# Altium PCB Copy of PWR_PCB.PcbDoc
Units mil, origin at the board's own origin, x right, y up, seen from the top; angles counter-clockwise.
Board outline 6000 x 4000 mil, 4 copper layers (Top Layer, GND Layer, Power Layer, Bottom Layer), stack 22.156 mil thick; 117 components, 88 nets, 434 pads, 478 vias.
Unrouted connection lines stored in the file: 169.
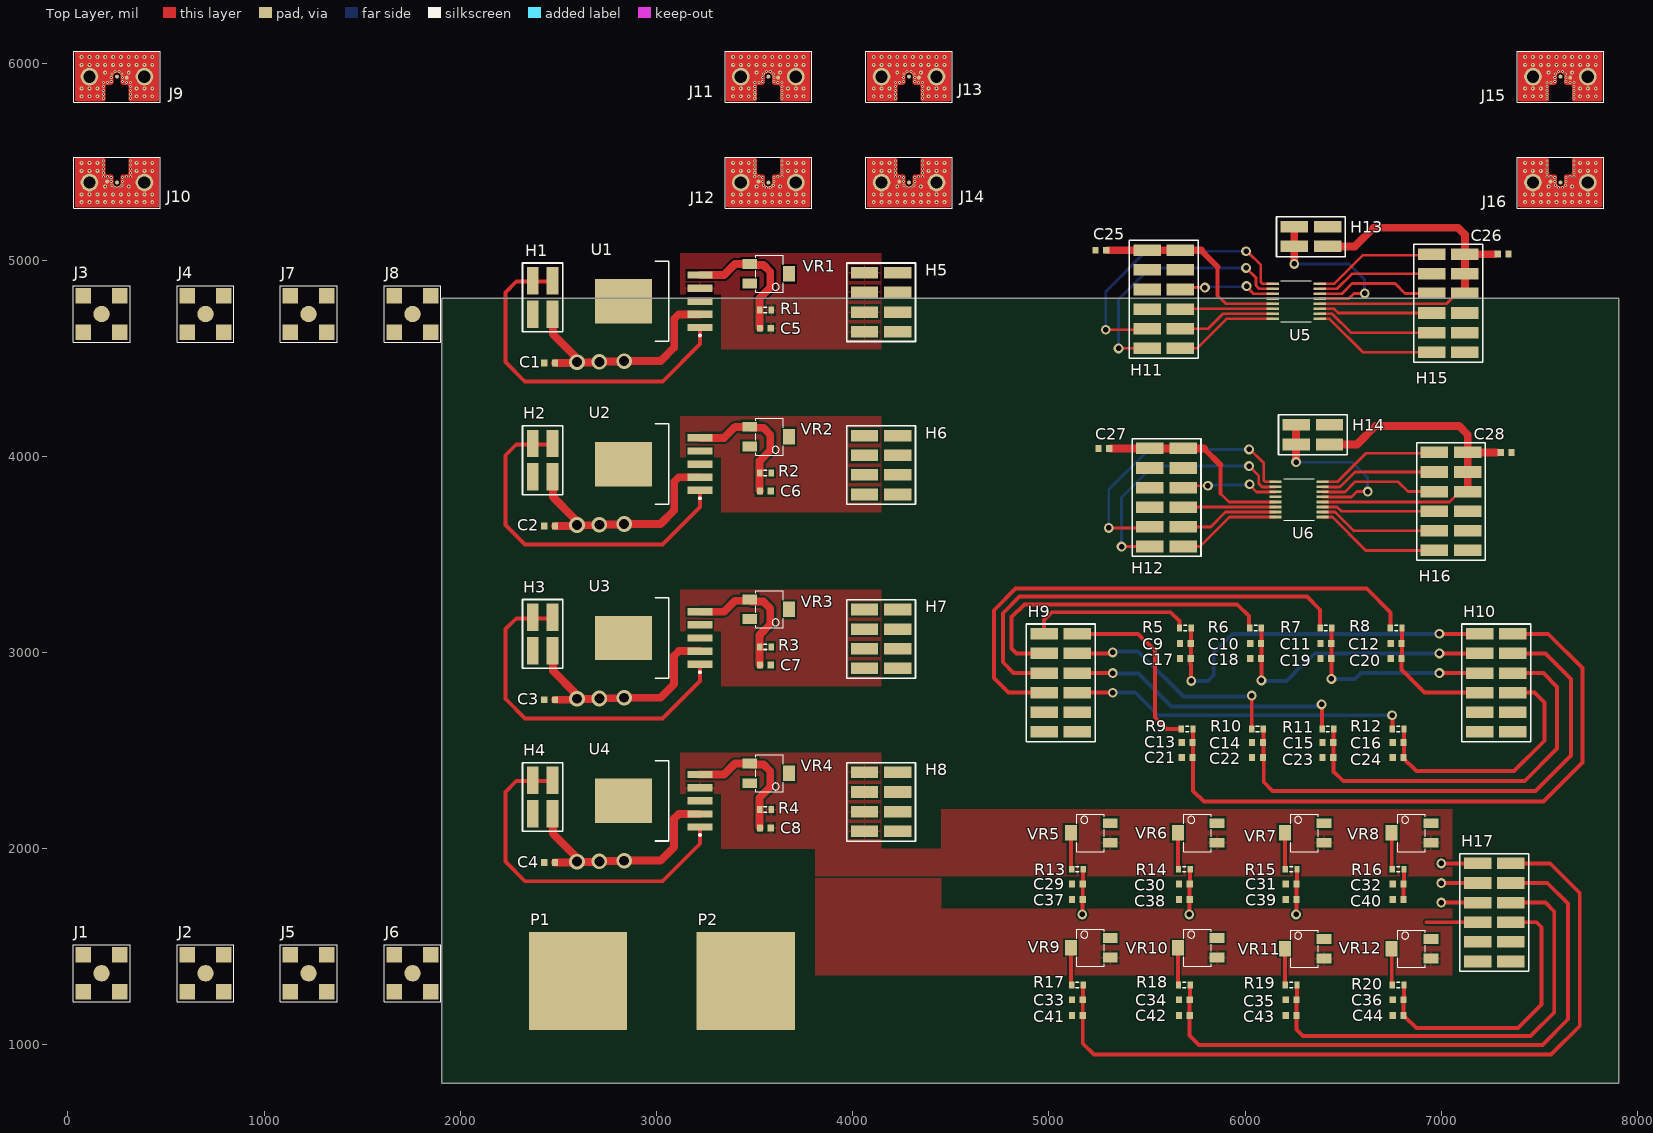
[diagram p0: Top Layer view]
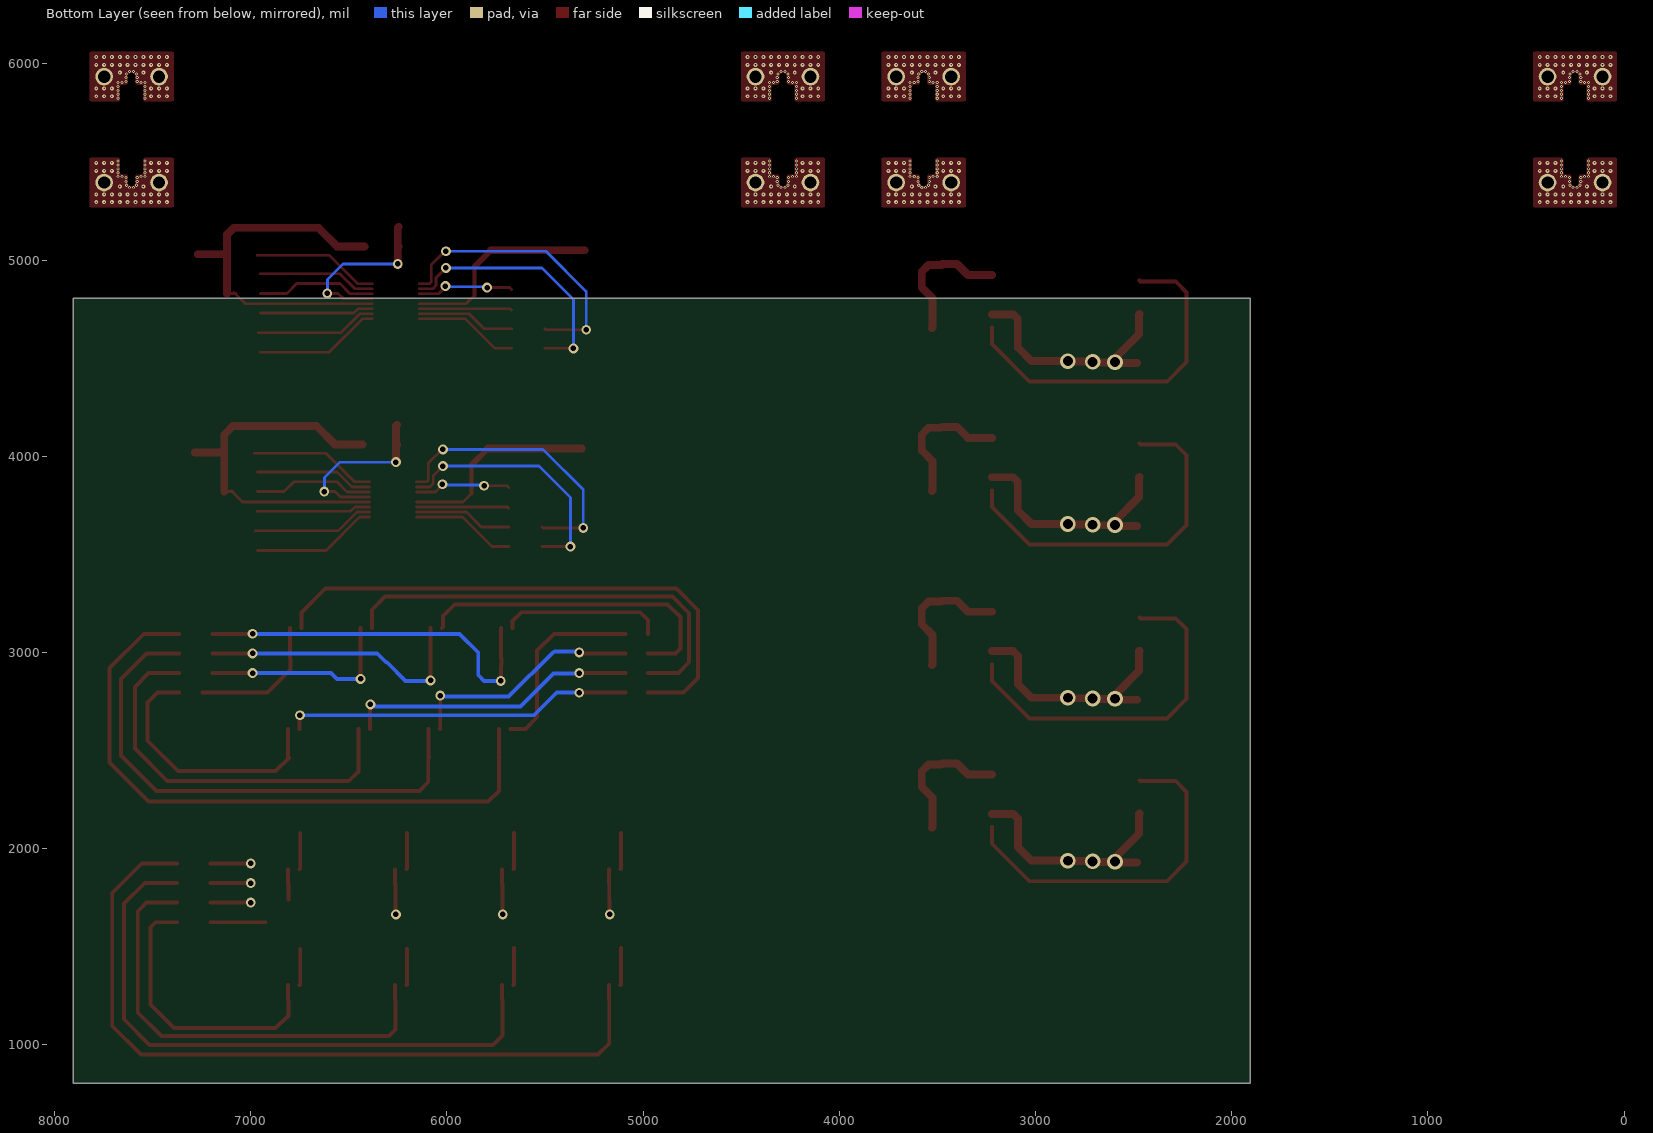
[diagram p1: Bottom Layer view, seen from below]
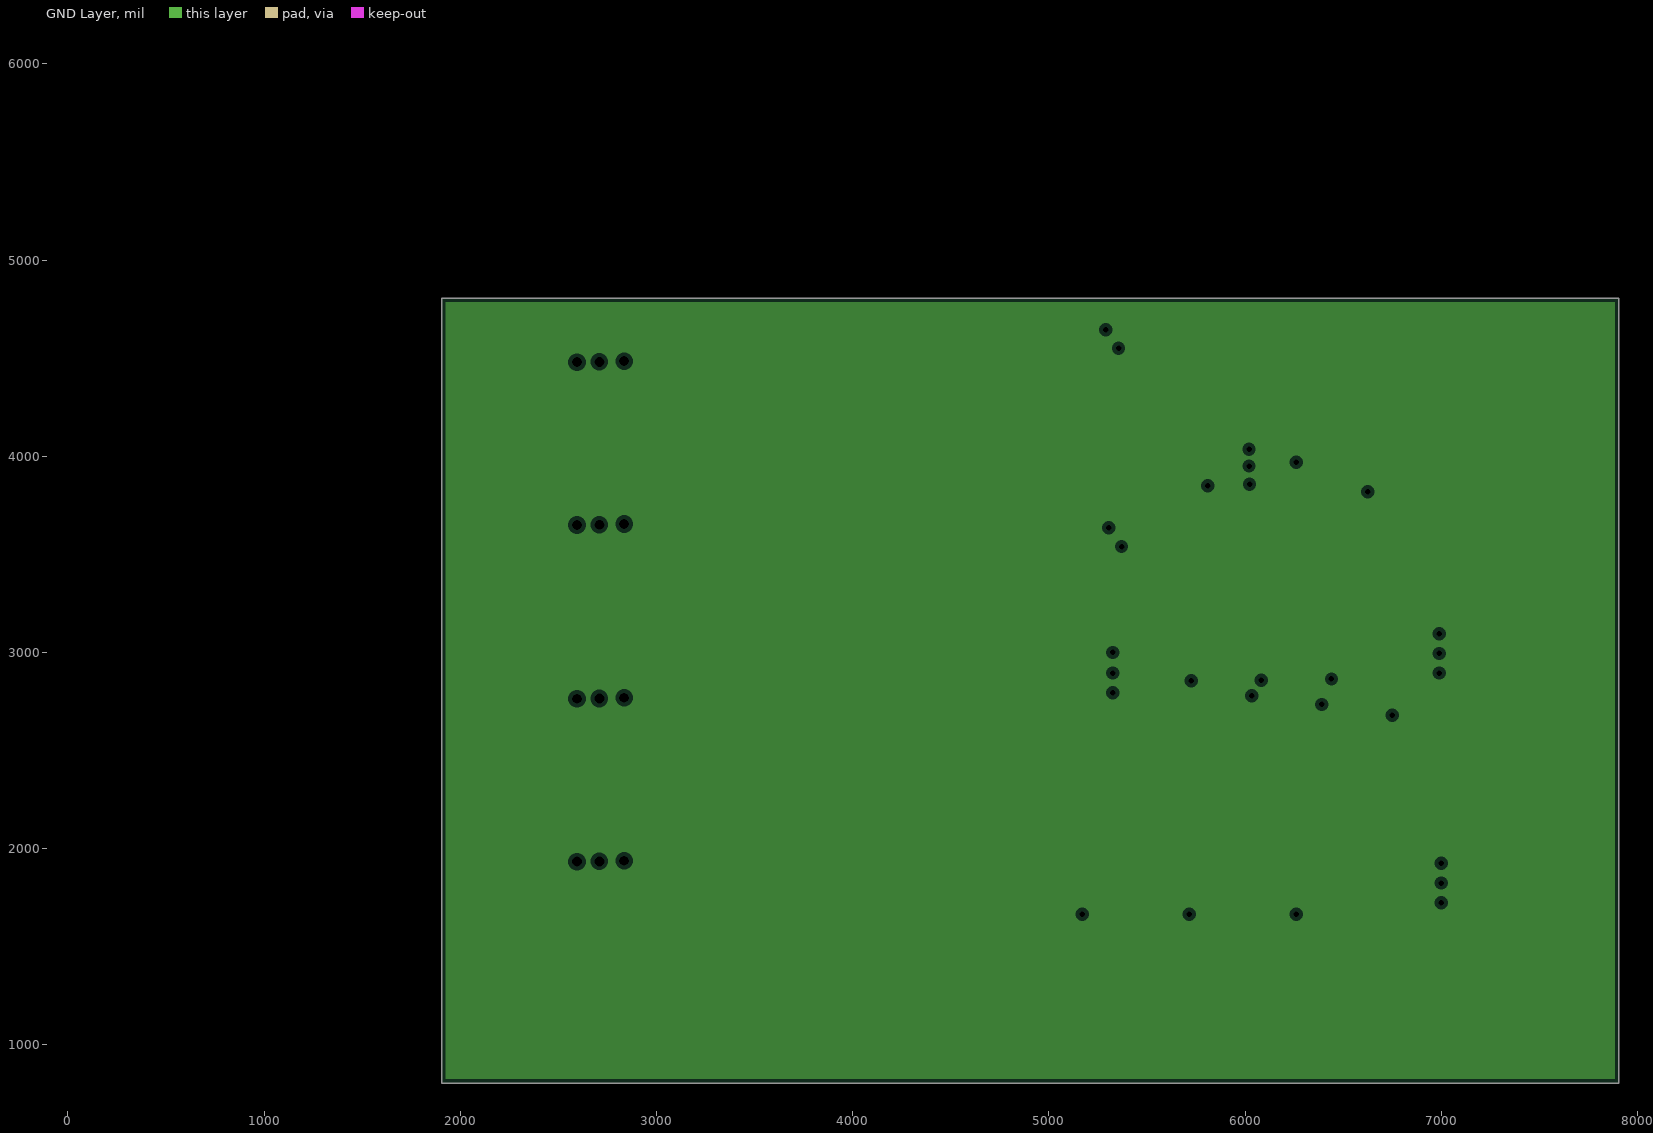
[diagram p2: GND Layer, clearances drawn from the general rule]
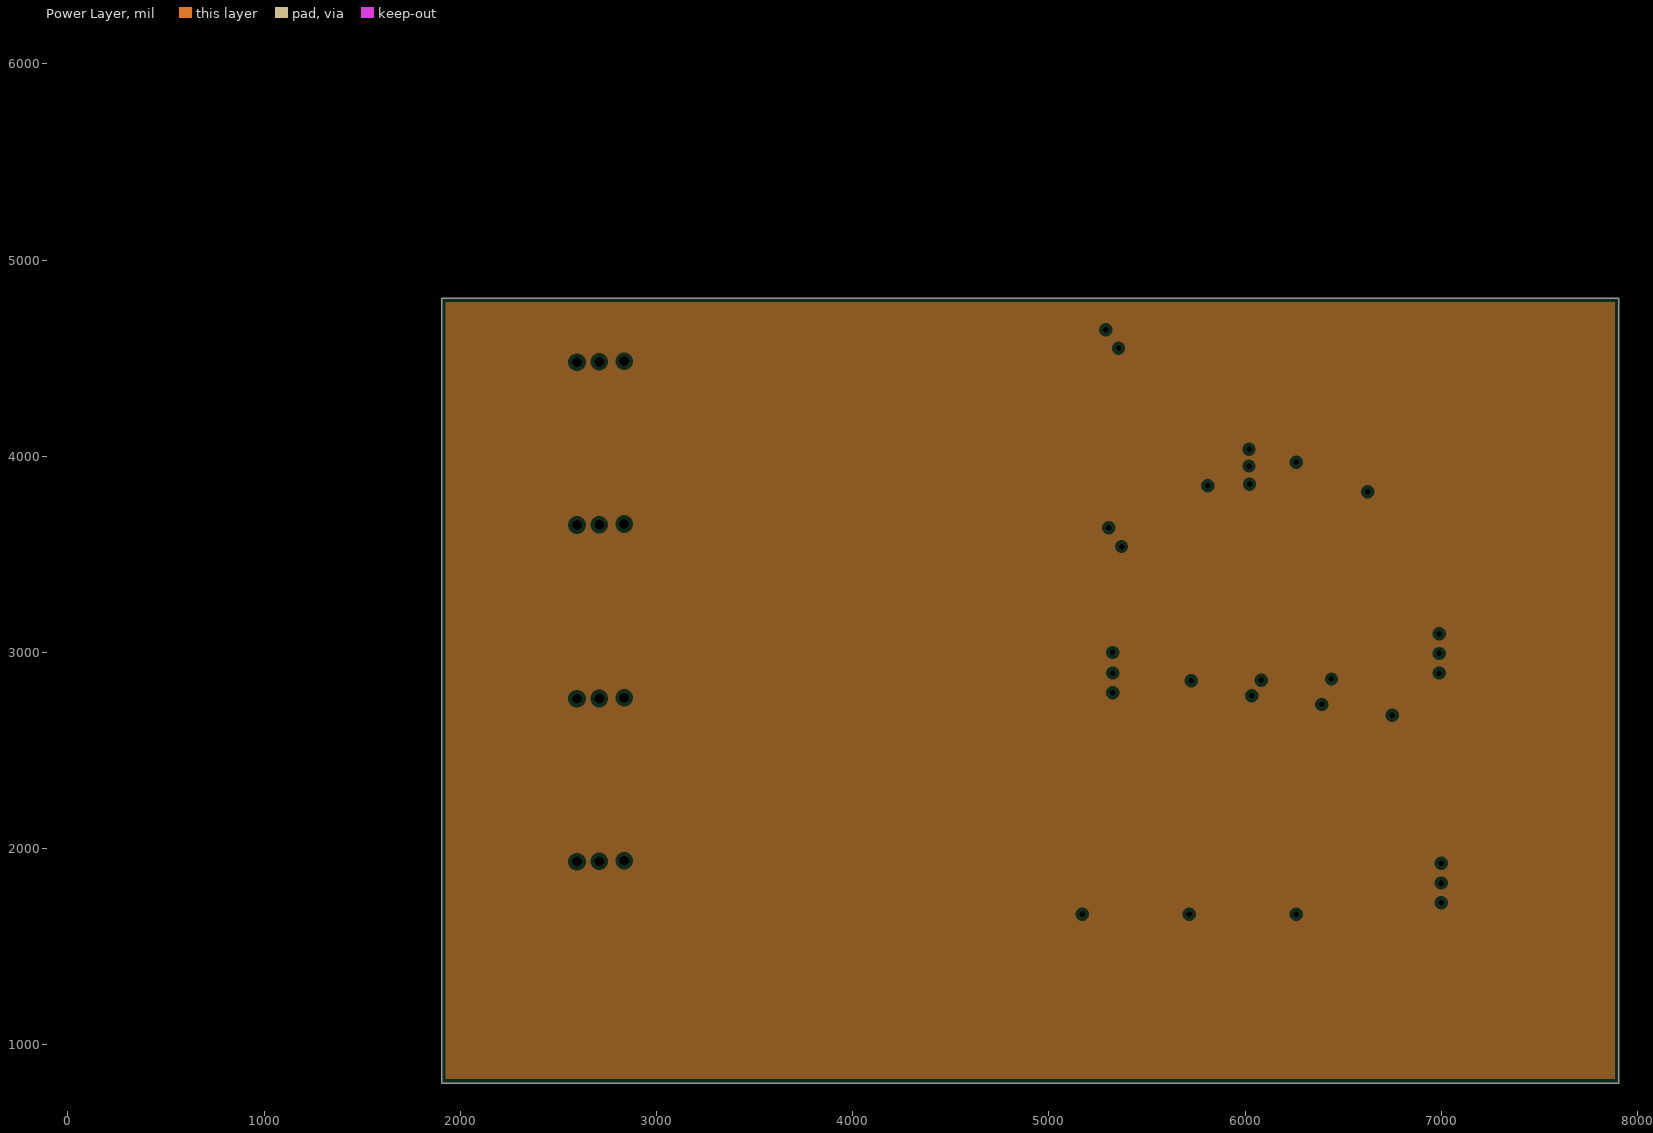
[diagram p3: Power Layer, clearances drawn from the general rule]

## Layer stack, top to bottom
Top Solder: solder mask 0.4, Solder Resist, Dk 3.5
Top Layer: signal copper 1.4
Dielectric 2: prepreg 2, PP-001, Dk 3.9
GND Layer: plane copper 1.378
Dielectric 1: dielectric 12.6, FR-4, Dk 4.8
Power Layer: plane copper 1.378
Dielectric 3: prepreg 2, PP-001, Dk 3.9
Bottom Layer: signal copper 1.4
Bottom Solder: solder mask 0.4, Solder Resist, Dk 3.5

## Board outline
1905,805 7905,805 7905,4805 1905,4805

## Design rules (kind name [scope] priority, off if disabled: settings)
Clearance [All] p1: gap=10 ignorepadtopadclearanceinfootprint=FALSE except(0: Arc-Hole Track-Hole SMDPad-Hole THPad-Hole Via-Hole Fill-Hole Poly-Hole Region-Hole Text-Hole)
DiffPairsRouting [All] p1: maxlimit=10 minlimit=10 mostfreqgap=10 toplayer_minwidth=15 toplayer_maxwidth=15 toplayer_prefwidth=15 bottomlayer_minwidth=15 bottomlayer_maxwidth=15 bottomlayer_prefwidth=15 maxuncoupledlength=500
PlaneClearance [All] p1: clearance=20
PlaneConnect [All] p1: planeconnectstyle=Relief reliefexpansion=20 reliefentries=4 reliefconductorwidth=10 reliefairgap=10
PolygonConnect [All] p1: connectstyle=Relief reliefconductorwidth=10 reliefentries=4 polygonreliefangle="90 Angle" airgapwidth=10
RoutingVias [All] p1: holewidth=28 width=50 viastyle="Through Hole" minholewidth=28 minwidth=50 maxholewidth=28 maxwidth=50
SolderMaskExpansion [All] p1: expansion=4 istentingtop=FALSE
Width [All] p1: maxlimit=40 minlimit=10 preferedwidth=20
27 further rules are at their usual default settings.

## Classes and differential pairs
component class PWR_PCB: C1 C2 C3 C4 C5 C6 C7 C8 C9 C10 C11 C12 C13 C14 C15 C16 C17 C18 C19 C20 C21 C22 C23 C24 C29 C30 C31 C32 C33 C34 C35 C36 C37 C38 C39 C40 H1 H2 H3 H4 H5 H6 H7 H8 H9 H10 H11 H12 H13 H14 J1 J2 J3 J4 J5 J6 J7 J8 J9 J10 J11 J12 J13 J14 J15 J16 P1 P2 R1 R2 R3 R4 R5 R6 R7 R8 R9 R10 R11 R12 R13 R14 R15 R16 R17 R18 R19 R20 U1 U2 U3 U4 U5 U6 VR1 VR2 VR3 VR4 VR5 VR6 VR7 VR8 VR9 VR10 VR11 VR12
differential pair CK3: +CK3_P -CK3_N
differential pair CK2: +CK2_P -CK2_N
differential pair CK1: +CK1_P -CK1_N
differential pair CK0: +CK0_P -CK0_N

## Components (designator, comment, footprint, x,y, rotation, side; value= is the part's Value field where it differs from the comment)
C1 "Cap Semi" 1608[0603] 2455,4475 r0 top value=10uF
C2 "Cap Semi" 1608[0603] 2455,3645 r0 top value=10uF
C3 "Cap Semi" 1608[0603] 2454.97,2758.92 r0 top value=10uF
C4 "Cap Semi" 1608[0603] 2454.97,1928.92 r0 top value=10uF
C5 "Cap Semi" 1608[0603] 3555,4652.5 r0 top value=3.3nF
C6 "Cap Semi" 1608[0603] 3555,3822.5 r0 top value=3.3nF
C7 "Cap Semi" 1608[0603] 3554.97,2936.42 r0 top value=3.3nF
C8 "Cap Semi" 1608[0603] 3554.97,2106.42 r0 top value=3.3nF
C9 "Cap Semi" 1608[0603] 5695,3045 r0 top value=10uF
C10 "Cap Semi" 1608[0603] 6053.33,3045 r0 top value=10uF
C11 "Cap Semi" 1608[0603] 6411.67,3045 r0 top value=10uF
C12 "Cap Semi" 1608[0603] 6770,3045 r0 top value=10uF
C13 "Cap Semi" 1608[0603] 5705,2540 r0 top value=10uF
C14 "Cap Semi" 1608[0603] 6063.33,2540 r0 top value=10uF
C15 "Cap Semi" 1608[0603] 6421.67,2540 r0 top value=10uF
C16 "Cap Semi" 1608[0603] 6780,2540 r0 top value=10uF
C17 "Cap Semi" 1608[0603] 5695,2970 r0 top value=1uF
C18 "Cap Semi" 1608[0603] 6053.33,2970 r0 top value=1uF
C19 "Cap Semi" 1608[0603] 6411.67,2970 r0 top value=1uF
C20 "Cap Semi" 1608[0603] 6770,2970 r0 top value=1uF
C21 "Cap Semi" 1608[0603] 5705,2465 r0 top value=1uF
C22 "Cap Semi" 1608[0603] 6063.33,2465 r0 top value=1uF
C23 "Cap Semi" 1608[0603] 6421.67,2465 r0 top value=1uF
C24 "Cap Semi" 1608[0603] 6780,2465 r0 top value=1uF
C25 "Cap Semi" 1608[0603] 5265,5050 r0 top value=1uF
C26 "Cap Semi" 1608[0603] 7315,5030 r180 top value=100nF
C27 "Cap Semi" 1608[0603] 5280,4040 r0 top value=1uF
C28 "Cap Semi" 1608[0603] 7330,4020 r180 top value=100nF
C29 "Cap Semi" 1608[0603] 5145,1820 r0 top value=10uF
C30 "Cap Semi" 1608[0603] 5690,1820 r0 top value=10uF
C31 "Cap Semi" 1608[0603] 6235,1820 r0 top value=10uF
C32 "Cap Semi" 1608[0603] 6780,1820 r0 top value=10uF
C33 "Cap Semi" 1608[0603] 5145,1230 r0 top value=10uF
C34 "Cap Semi" 1608[0603] 5690,1230 r0 top value=10uF
C35 "Cap Semi" 1608[0603] 6235,1230 r0 top value=10uF
C36 "Cap Semi" 1608[0603] 6780,1230 r0 top value=10uF
C37 "Cap Semi" 1608[0603] 5145,1740 r0 top value=1uF
C38 "Cap Semi" 1608[0603] 5690,1740 r0 top value=1uF
C39 "Cap Semi" 1608[0603] 6235,1740 r0 top value=1uF
C40 "Cap Semi" 1608[0603] 6780,1740 r0 top value=1uF
C41 "Cap Semi" 1608[0603] 5145,1150 r0 top value=1uF
C42 "Cap Semi" 1608[0603] 5690,1150 r0 top value=1uF
C43 "Cap Semi" 1608[0603] 6235,1150 r0 top value=1uF
C44 "Cap Semi" 1608[0603] 6780,1150 r0 top value=1uF
H1 "HEADER_2X2_SMT" HEADER_2X2_SMT 2420,4810 r90 top
H2 "HEADER_2X2_SMT" HEADER_2X2_SMT 2420,3980 r90 top
H3 "HEADER_2X2_SMT" HEADER_2X2_SMT 2419.97,3094.92 r90 top
H4 "HEADER_2X2_SMT" HEADER_2X2_SMT 2419.97,2263.92 r90 top
H5 "HEADER_2X4_SMT" HEADER_2X4_SMT 4145,4785 r180 top
H6 "HEADER_2X4_SMT" HEADER_2X4_SMT 4145,3955 r180 top
H7 "HEADER_2X4_SMT" HEADER_2X4_SMT 4144.97,3068.92 r180 top
H8 "HEADER_2X4_SMT" HEADER_2X4_SMT 4144.97,2238.92 r180 top
H9 "HEADER_2X6_SMT" HDR2X6_SMT 5060,2845 r0 top
H10 "HEADER_2X6_SMT" HDR2X6_SMT 7280,2845 r0 top
H11 "HEADER_2X6_SMT" HDR2X6_SMT 5585,4800 r180 top
H12 "HEADER_2X6_SMT" HDR2X6_SMT 5600,3790 r180 top
H13 "HEADER_2X2_SMT" HEADER_2X2_SMT 6335,5120 r180 top
H14 "HEADER_2X2_SMT" HEADER_2X2_SMT 6345,4110 r180 top
H15 "HEADER_2X6_SMT" HDR2X6_SMT 7035,4780 r180 top
H16 "HEADER_2X6_SMT" HDR2X6_SMT 7050,3770 r180 top
H17 "HEADER_2X6_SMT" HDR2X6_SMT 7270,1675 r0 top
J1 "Con RF SMA" CON-001-250X250/SMA-SMT 171.5,1365 r90 top
J2 "Con RF SMA" CON-001-250X250/SMA-SMT 701.5,1365 r90 top
J3 "Con RF SMA" CON-001-250X250/SMA-SMT 171.5,4725 r90 top
J4 "Con RF SMA" CON-001-250X250/SMA-SMT 701.5,4725 r90 top
J5 "Con RF SMA" CON-001-250X250/SMA-SMT 1226.5,1365 r90 top
J6 "Con RF SMA" CON-001-250X250/SMA-SMT 1756.5,1365 r90 top
J7 "Con RF SMA" CON-001-250X250/SMA-SMT 1226.5,4725 r90 top
J8 "Con RF SMA" CON-001-250X250/SMA-SMT 1756.5,4725 r90 top
J9 "CON_K_SMT_2d92" CON_K_SMT_2d92 250,5935 r270 top
J10 "CON_K_SMT_2d92" CON_K_SMT_2d92 250,5395 r90 top
J11 "CON_K_SMT_2d92" CON_K_SMT_2d92 3570,5935 r270 top
J12 "CON_K_SMT_2d92" CON_K_SMT_2d92 3570,5395 r90 top
J13 "CON_K_SMT_2d92" CON_K_SMT_2d92 4287,5935 r270 top
J14 "CON_K_SMT_2d92" CON_K_SMT_2d92 4287,5395 r90 top
J15 "CON_K_SMT_2d92" CON_K_SMT_2d92 7607,5935 r270 top
J16 "CON_K_SMT_2d92" CON_K_SMT_2d92 7607,5395 r90 top
P1 "BANANA_JACK_SMT" BANANA_JACK_SMT 2600,1325 r0 top
P2 "BANANA_JACK_SMT" BANANA_JACK_SMT 3455,1325 r0 top
R1 "Res3" J1-0603 3555,4745 r0 top value=1.4K
R2 "Res3" J1-0603 3555,3915 r0 top value=1.4K
R3 "Res3" J1-0603 3554.97,3028.92 r0 top value=1.4K
R4 "Res3" J1-0603 3554.97,2198.92 r0 top value=1.4K
R5 "Res3" J1-0603 5695,3125 r180 top value=1K
R6 "Res3" J1-0603 6053.33,3125 r180 top value=1K
R7 "Res3" J1-0603 6411.67,3125 r180 top value=1K
R8 "Res3" J1-0603 6770,3125 r180 top value=1K
R9 "Res3" J1-0603 5705,2610 r180 top value=1K
R10 "Res3" J1-0603 6063.33,2610 r180 top value=1K
R11 "Res3" J1-0603 6421.67,2610 r180 top value=1K
R12 "Res3" J1-0603 6780,2610 r180 top value=1K
R13 "Res3" J1-0603 5145,1895 r180 top value=1K
R14 "Res3" J1-0603 5690,1895 r180 top value=1K
R15 "Res3" J1-0603 6235,1895 r180 top value=1K
R16 "Res3" J1-0603 6780,1895 r180 top value=1K
R17 "Res3" J1-0603 5145,1305 r180 top value=1K
R18 "Res3" J1-0603 5690,1305 r180 top value=1K
R19 "Res3" J1-0603 6235,1305 r180 top value=1K
R20 "Res3" J1-0603 6780,1305 r180 top value=1K
U1 "LP38511TJ-ADJ" TJ5A_N 2985,4790 r180 top
U2 "LP38511TJ-ADJ" TJ5A_N 2985,3960 r180 top
U3 "LP38511TJ-ADJ" TJ5A_N 2984.97,3073.92 r180 top
U4 "LP38511TJ-ADJ" TJ5A_N 2984.97,2243.92 r180 top
U5 "MAX13003" MAX13003 6260,4790 r180 top
U6 "MAX13003" MAX13003 6275,3780 r180 top
VR1 "5K" POT_3214_Top 3574.97,4930 r0 top
VR2 "5K" POT_3214_Top 3574.97,4100 r0 top
VR3 "5K" POT_3214_Top 3574.97,3220 r0 top
VR4 "5K" POT_3214_Top 3574.97,2383.92 r0 top
VR5 "5K" POT_3214_Top 5212.19,2080 r180 top
VR6 "5K" POT_3214_Top 5757.19,2080 r180 top
VR7 "5K" POT_3214_Top 6302.19,2080 r180 top
VR8 "5K" POT_3214_Top 6847.19,2080 r180 top
VR9 "5K" POT_3214_Top 5212.19,1495 r180 top
VR10 "5K" POT_3214_Top 5757.19,1495 r180 top
VR11 "5K" POT_3214_Top 6302.19,1490 r180 top
VR12 "5K" POT_3214_Top 6847.19,1490 r180 top

## Footprints (in the part's own frame and the unit in brackets; to place one, negate y for a bottom-side part, rotate by r counter-clockwise, add the part's x,y. Pads: shape width x height; smd on the part's side, far side on the other; paste and mask are expansions set on the pad)
1608[0603] [mm] "Chip Capacitor, Body 1.6x0.8mm, IPC High Density"
  rect 0.8x0.9 smd: 1(-0.7,0) 2(0.7,0)
  body extent -0.87,-0.48 0.87,0.48, height 1.3
BANANA_JACK_SMT [mil]
  rect 500x500 smd: 1(0,0)
CON-001-250X250/SMA-SMT [mm]
  round 2.127 smd: 1(0,0)
  rect 2x2 smd: 2(-2.375,2.375) 3(2.375,2.375) 4(2.375,-2.375) 5(-2.375,-2.35)
  silkscreen extent -3.68,-3.68 3.68,3.68, body extent -3.17,-3.17 3.18,3.17, height 9.65
CON_K_SMT_2d92 [mil]
  round 90 hole 63: 1(0,140) 4(0,-140)
  round 19.68 smd paste-9.84 mask+9.84: 2(5,50)
  round 20 smd paste-10: 3(0,0)
  Top Layer region: -125.52,195 125.51,195 125.51,215 -125.52,215
  Top Layer region: -125.52,-215 125.51,-215 125.51,-195 -125.52,-195
  Top Layer region: -125,-205.52 -125.2,-205.48 -125.36,-205.36 -125.48,-205.2 -125.52,-205 -125.52,-205 -125.52,205 -125.46,205.22 -125.32,205.4 -125.11,205.5 -124.89,205.5 -124.68,205.4 -124.54,205.22 -124.48,205 -124.48,205 -124.48,0.51 -20.51,0.51 -17.59,10.55 -10.11,17.85 0,20.51 0,20.51 0.2,20.48 0.36,20.36 0.48,20.2 0.52,20 0.52,20 0.48,19.8 0.36,19.64 0.2,19.52 0,19.49 0,19.49 -7.46,18 -13.78,13.78 -18,7.46 -19.48,0 -19.48,0 -18,-7.46 -13.78,-13.78 -7.46,-18 0,-19.49 0,-19.49 30,-19.49 34.02,-20.29 37.44,-22.56 39.71,-25.98 40.52,-30 40.52,-30 40.49,-30.15 40.43,-30.29 40.43,-30.29 40.49,-30.42 40.52,-30.58 40.52,-30.58 40.52,-50 41.24,-53.63 43.29,-56.71 46.37,-58.76 50,-59.49 50,-59.49 115,-59.48 119.02,-60.29 122.44,-62.56 124.71,-65.98 125.52,-70 125.52,-70 125.52,-205 125.48,-205.2 125.36,-205.36 125.2,-205.48 125,-205.51 125,-205.51
  Top Layer region: -125.52,-205 -125.46,-205.22 -125.32,-205.4 -125.11,-205.5 -124.89,-205.5 -124.68,-205.4 -124.54,-205.22 -124.48,-205 -124.48,-205 -124.48,-0.52 -20.51,-0.51 -17.59,-10.55 -10.11,-17.85 0,-20.51 0,-20.51 0.2,-20.48 0.36,-20.36 0.48,-20.2 0.52,-20 0.52,-20 0.48,-19.8 0.36,-19.64 0.2,-19.52 0,-19.49 0,-19.49 -7.46,-18 -13.78,-13.78 -18,-7.46 -19.48,0 -19.48,0 -18,7.46 -13.78,13.78 -7.46,18 0,19.49 0,19.49 30,19.49 34.02,20.29 37.44,22.56 39.71,25.98 40.52,30 40.52,30 40.52,50 41.24,53.63 43.29,56.71 46.37,58.76 50,59.49 50,59.49 115,59.49 119.02,60.29 122.44,62.56 124.71,65.98 125.52,70 125.52,70 125.52,205 125.48,205.2 125.36,205.36 125.2,205.48 125,205.52 125,205.52 -125,205.51 -125.2,205.48 -125.36,205.36 -125.48,205.2 -125.52,205 -125.52,205
  silkscreen extent -130,-220 130,220
HDR2X6_SMT [mil]
  rect 140x59.06 smd: 1(-85,250) 2(-85,150) 3(-85,50) 4(-85,-50) 5(-85,-150) 6(-85,-250) 7(85,250) 8(85,150) 9(85,50) 10(85,-50) 11(85,-150) 12(85,-250)
  silkscreen extent -175,-300 175,300
HEADER_2X2_SMT [mil]
  rect 140x59.06 smd: 1(-85,50) 2(85,50) 3(-85,-50) 4(85,-50)
  silkscreen extent -175,-101 175,103
HEADER_2X4_SMT [mil]
  rect 140x59.06 smd: 1(-85,150) 2(85,150) 3(-85,50) 4(85,50) 5(-85,-50) 6(85,-50) 7(-85,-150) 8(85,-150)
  silkscreen extent -175,-200 175,200
J1-0603 [mm] "Chip Resistor, Body 1.6x0.8mm, IPC High Density"
  rect 0.7x0.9 smd: 1(-0.75,0) 2(0.75,0)
  silkscreen extent -0.2,-0.35 0.2,0.35, body extent -0.85,-0.48 0.85,0.48, height 0.9
MAX13003 [mil]
  rect 62.5x13.5 smd paste+0 mask+2: 1(-119.75,89.57) 2(-119.75,63.98) 3(-119.75,38.39) 4(-119.75,12.8) 5(-119.75,-12.8) 6(-119.75,-38.39) 7(-119.75,-63.98) 8(-119.75,-89.57) 9(119.75,-89.57) 10(119.75,-63.98) 11(119.75,-38.39) 12(119.75,-12.8) 13(119.75,12.8) 14(119.75,38.39) 15(119.75,63.98) 16(119.75,89.57)
  silkscreen extent -78,-106 78,106
POT_3214_Top [mil] "5 turn Trimpot, 3214, Top adjust"
  rect 75x50 smd: 1(-100,50) 3(-100,-50)
  rect 61x79 smd: 2(100,0)
  silkscreen extent -70,-95 70,95, body extent -70,-95 70,95, height 200
TJ5A_N [mm] "D2-PAK, 6-Leads, Body 9.9x10.2mm, Pitch 1.7mm, Lead Span 14mm, IPC Medium Density"
  rect 3.2x0.95 smd: 1(-6,3.4) 2(-6,1.7) 3(-6,0) 4(-6,-1.7) 5(-6,-3.4)
  rect 7.4x5.75 smd: 6(3.9,0)
  silkscreen extent -6.13,-5.2 -0.2,5.2, body extent -1.95,-5.2 8.15,5.2, height 2.1

## Part data
C1 C2 C3 C4 C5 C6 C7 C8 C9 C10 C11 C12 C13 C14 C15 C16 C17 C18 C19 C20 C21 C22 C23 C24 C25 C26 C27 C28 C29 C30 C31 C32 C33 C34 C35 C36 C37 C38 C39 C40 C41 C42 C43 C44: "Capacitor (Semiconductor SIM Model)", LatestRevisionDate=29-May-2009, LatestRevisionNote="IPC-7351 Footprint Added.", PackageDescription="Chip Capacitor", PackageReference=C1206, Published=8-Jun-2000, Publisher="Altium Limited"
J1 J2 J3 J4 J5 J6 J7 J8: library part CON_RF_SMA
J9 J10 J11 J12 J13 J14 J15 J16: "Con RF K"
R1 R2 R3 R4 R5 R6 R7 R8 R9 R10 R11 R12 R13 R14 R15 R16 R17 R18 R19 R20: "Resistor", LatestRevisionDate=29-May-2009, LatestRevisionNote="IPC-7351 Footprint Added.", PackageDescription="Chip Resistor", PackageReference=J1-0603, Published=8-Jun-2000, Publisher="Altium Limited"
U1 U2 U3 U4: "800 mA Fast-Transient Response Low-Dropout Linear Voltage Regulator with Error Flag, 6-pin TO-263 Thin", Manufacturer="National Semiconductor", PackageTopMarking=NSUZXYTTE#*LP38511*TJ-ADJ, PowerWise=N, ComponentLink1Description="Manufacturer URL", ComponentLink1URL=http://www.national.com/, ComponentLink2Description="LP38511 Datasheet", ComponentLink2URL=http://www.national.com/ds/LP/LP38511-ADJ.pdf, ComponentLink3Description="LP38511 Web Page", ComponentLink3URL=http://www.national.com/pf/LP/LP38511.html, ComponentLink4Description="TJ5A Package Page", ComponentLink4URL=http://www.national.com/packaging/folders/tj5a.html, CompType="LDO IC", DatasheetVersion=Feb-2009, High-Reliability=Y, PackageDescription="Thin TO-263, Molded, 9.85 x 10.16 x 2mm Body, 5 Lead, 1.7mm Pitch, Surface Mount", PackageReference=TJ5A, PackageVersion="revE, Jan-2008", PartNumber=LP38511TJ-ADJ, PinCount=5, RoHS=Y
VR1 VR2 VR3 VR4 VR5 VR6 VR7 VR8 VR9 VR10 VR11 VR12: library part RPot_5K, "Potentiometer", Manufacturer=Bourns, Manufacturer ID=3214X-1-502E, Digikey ID=3214X-1-502ECT-ND

## Via types
v1: diameter 20, hole 8, Top Layer to Bottom Layer, tented both sides, 272 vias
v2: diameter 15.98, hole 6, Top Layer to Bottom Layer, tented both sides, 160 vias
v3: diameter 50, hole 28, Top Layer to Bottom Layer, 34 vias
v4: diameter 80, hole 50, Top Layer to Bottom Layer, 12 vias

## Nets (pads, with @x,y where several pads share a name; then routed paths per layer and width w, separated by ;. In a path a pad name is that pad's centre, name@x,y a point inside that pad or via, vN(x,y) a via of type N, cw(c..) or ccw(c..) an arc to the next point about the centre after c; other vN are vias at no path point)
CK0_N: J3.1 J7.1
CK0_P: J1.1 J5.1
CK1_N: J4.1 J8.1
CK1_P: J2.1 J6.1
CK2_N: J10.3 J14.3
CK2_P: J9.3 J13.3
CK3_N: J12.3 J16.3
CK3_P: J11.3 J15.3
DIG0_0: H15.7 U5.1 | length 640.8
  Top Layer w14: U5.1 6429.57,4700.43 6600,4530 H15.7
DIG0_1: H16.7 U6.1 | length 640.8
  Top Layer w14: U6.1 6444.57,3690.43 6615,3520 H16.7
DIG0_V33_0: H11.1 U5.16 | length 532.6
  Top Layer w14: H11.1 5755,4550 5905.43,4700.43 U5.16
DIG0_V33_1: H12.1 U6.16 | length 532.6
  Top Layer w14: H12.1 5770,3540 5920.43,3690.43 U6.16
DIG1_0: H15.8 U5.2 | length 620
  Top Layer w14: U5.2 6443.98,4726.02 6540,4630 H15.8 H15.8@6960,4630
DIG1_1: H16.8 U6.2 | length 620
  Top Layer w14: U6.2 6458.98,3716.02 6555,3620 H16.8 H16.8@6975,3620
DIG1_V33_0: H11.2 U5.15 | length 501.7
  Top Layer w14: H11.2 5810,4650 5886.02,4726.02 U5.15
DIG1_V33_1: H12.2 U6.15 | length 501.7
  Top Layer w14: H12.2 5825,3640 5901.02,3716.02 U6.15
DIG2_0: H15.9 U5.3 | length 579.2
  Top Layer w14: U5.3 6453.39,4751.61 6475,4730 H15.9
DIG2_1: H16.9 U6.3 | length 579.2
  Top Layer w14: U6.3 6468.39,3741.61 6490,3720 H16.9
DIG2_V33_0: H11.3 U5.14 | length 473
  Top Layer w14: H11.3@5670,4745 5676.61,4751.61 U5.14
DIG2_V33_1: H12.3 U6.14 | length 473
  Top Layer w14: H12.3@5685,3735 5691.61,3741.61 U6.14
DIG3_0: H15.10 U5.6 | length 612.3
  Top Layer w14: U5.6 6493.39,4828.39 6545,4880 6765,4880 6815,4830 H15.10
DIG3_1: H16.10 U6.6 | length 612.3
  Top Layer w14: U6.6 6508.39,3818.39 6560,3870 6780,3870 6830,3820 H16.10
DIG3_V33_0: H11.4 U5.11 | length 495.6
  Top Layer w14: H11.4 5680,4860 v3(5795,4860) ; v3(6007.5,4867.5) 6007.5,4864.23 6043.34,4828.39 U5.11
  Bottom Layer w14: v3(5795,4860) 5798.75,4863.75 6003.75,4863.75 v3(6007.5,4867.5)
DIG3_V33_1: H12.4 U6.11 | length 495.6
  Top Layer w14: H12.4 5695,3850 v3(5810,3850) ; v3(6022.5,3857.5) 6022.5,3854.23 6058.34,3818.39 U6.11
  Bottom Layer w14: v3(5810,3850) 5813.75,3853.75 6018.75,3853.75 v3(6022.5,3857.5)
DIG4_0: H15.11 U5.7 | length 601.7
  Top Layer w14: U5.7 6468.98,4853.98 6545,4930 H15.11
DIG4_1: H16.11 U6.7 | length 601.7
  Top Layer w14: U6.7 6483.98,3843.98 6560,3920 H16.11
DIG4_V33_0: H11.7 U5.10 | length 1313.9
  Top Layer w14: v3(5355,4550) H11.7 ; v3(6005,4960) 6055,4910 6055,4870 6071.02,4853.98 U5.10
  Bottom Layer w14: v3(5355,4550) 5355,4800 5515,4960 v3(6005,4960)
DIG4_V33_1: H12.7 U6.10 | length 1313.9
  Top Layer w14: v3(5370,3540) H12.7 ; v3(6020,3950) 6070,3900 6070,3860 6086.02,3843.98 U6.10
  Bottom Layer w14: v3(5370,3540) 5370,3790 5530,3950 v3(6020,3950)
DIG5_0: H15.12 U5.8 | length 645.5
  Top Layer w14: U5.8 6454.57,4879.57 6600,5025 6930,5025 6935,5025 H15.12@6965,5025
DIG5_1: H16.12 U6.8 | length 645.5
  Top Layer w14: U6.8 6469.57,3869.57 6615,4015 6945,4015 6950,4015 H16.12@6980,4015
DIG5_V33_0: H11.8 U5.9 | length 1461.9
  Top Layer w14: v3(5290,4645) 5495,4645 H11.8 ; v3(6005,5045) 6010,5045 6080,4975 6080,4887.77 6088.2,4879.57 U5.9
  Bottom Layer w14: v3(5290,4645) 5290,4840 5495,5045 v3(6005,5045)
DIG5_V33_1: H12.8 U6.9 | length 1461.9
  Top Layer w14: v3(5305,3635) 5510,3635 H12.8 ; v3(6020,4035) 6025,4035 6095,3965 6095,3877.77 6103.2,3869.57 U6.9
  Bottom Layer w14: v3(5305,3635) 5305,3830 5510,4035 v3(6020,4035)
EN_LVL_0: H13.2 H13.4 U5.5 | length 896.4
  Top Layer w14: U5.5 6527.8,4802.8 6555,4830 v3(6610,4830)
  Top Layer w40: H13.2@6245,5070 6250,5075 6250,5165 H13.4@6245,5170 ; H13.2@6247.5,5062.97 6250,5060.47 v3(6250,4980)
  Bottom Layer w14: v3@6245,4980 6530,4980 6608.97,4901.03 v3@6608.97,4831.03
EN_LVL_1: H14.2 H14.4 U6.5 | length 897.8
  Top Layer w14: U6.5 6542.8,3792.8 6570,3820 v3(6625,3820)
  Top Layer w40: H14.2@6255,4060 6260,4065 6260,4155 H14.4@6255,4160 ; H14.2@6257.5,4052.97 6260,4050.47 v3(6260,3970)
  Bottom Layer w14: v3(6260,3970) 6545,3970 6623.97,3891.03 6623.97,3821.03 v3(6625,3820)
EN_VDD0: H1.2 H1.4 U1.1 | length 1816.6
  Top Layer w20: H1.4 2465,4890 2370,4890 2285,4890 2230,4835 2230,4480 2330,4380 3030,4380 3221.22,4571.22 U1.1
EN_VDD1: H2.2 H2.4 U2.1 | length 1816.6
  Top Layer w20: H2.4 2465,4060 2370,4060 2285,4060 2230,4005 2230,3650 2330,3550 3030,3550 3221.22,3741.22 U2.1
EN_VDD2: H3.2 H3.4 U3.1 | length 1816.6
  Top Layer w20: H3.4@2469.97,3178.92 2464.97,3173.92 2369.97,3173.92 2284.97,3173.92 2229.97,3118.92 2229.97,2763.92 2329.97,2663.92 3029.97,2663.92 3221.19,2855.14 U3.1
EN_VDD3: H4.2 H4.4 U4.1 | length 1816.6
  Top Layer w20: H4.4 2464.97,2343.92 2369.97,2343.92 2284.97,2343.92 2229.97,2288.92 2229.97,1933.92 2329.97,1833.92 3029.97,1833.92 3221.19,2025.14 U4.1
GND: C1.1 C2.1 C3.1 C4.1 C9.1 C10.1 C11.1 C12.1 C13.1 C14.1 C15.1 C16.1 C17.1 C18.1 C19.1 C20.1 C21.1 C22.1 C23.1 C24.1 C25.1 C26.1 C27.1 C28.1 C29.1 C30.1 C31.1 C32.1 C33.1 C34.1 C35.1 C36.1 C37.1 C38.1 C39.1 C40.1 C41.1 C42.1 C43.1 C44.1 H1.1 H2.1 H3.1 H4.1 H5.1 H5.3 H5.5 H5.7 H6.1 H6.3 H6.5 H6.7 H7.1 H7.3 H7.5 H7.7 H8.1 H8.3 H8.5 H8.7 H9.5 H9.11 H10.5 H10.11 H11.5 H11.11 H12.5 H12.11 H13.3 H14.3 H15.1 H15.2 H15.3 H16.1 H16.2 H16.3 H17.5 H17.11 J1.2 J1.3 J1.4 J1.5 J2.2 J2.3 J2.4 J2.5 J3.2 J3.3 J3.4 J3.5 J4.2 J4.3 J4.4 J4.5 J5.2 J5.3 J5.4 J5.5 J6.2 J6.3 J6.4 J6.5 J7.2 J7.3 J7.4 J7.5 J8.2 J8.3 J8.4 J8.5 J9.1 J9.2 J9.4 J10.1 J10.2 J10.4 J11.1 J11.2 J11.4 J12.1 J12.2 J12.4 J13.1 J13.2 J13.4 J14.1 J14.2 J14.4 J15.1 J15.2 J15.4 J16.1 J16.2 J16.4 P2.1 U1.3 U1.6 U2.3 U2.6 U3.3 U3.6 U4.3 U4.6 U5.12 U6.12 VR1.2 VR2.2 VR3.2 VR4.2
  other v1: 70,5295 110,5295 150,5295 190,5295 230,5295 270,5295 310,5295 350,5295 390,5295 430,5295 3390,5295 3430,5295 3470,5295 3510,5295 3550,5295 3590,5295 3630,5295 3670,5295 3710,5295 3750,5295 4107,5295 4147,5295 4187,5295 4227,5295 4267,5295 4307,5295 4347,5295 4387,5295 4427,5295 4467,5295 7427,5295 7467,5295 7507,5295 7547,5295 7587,5295 7627,5295 7667,5295 7707,5295 7747,5295 7787,5295 70,5335 110,5335 150,5335 190,5335 230,5335 270,5335 310,5335 350,5335 390,5335 430,5335 3390,5335 3430,5335 3470,5335 3510,5335 3550,5335 3590,5335 3630,5335 3670,5335 3710,5335 3750,5335 4107,5335 4147,5335 4187,5335 4227,5335 4267,5335 4307,5335 4347,5335 4387,5335 4427,5335 4467,5335 7427,5335 7467,5335 7507,5335 7547,5335 7587,5335 7627,5335 7667,5335 7707,5335 7747,5335 7787,5335 190,5375 310,5375 3510,5375 3630,5375 4227,5375 4347,5375 7547,5375 7667,5375 70,5455 110,5455 150,5455 350,5455 390,5455 430,5455 3390,5455 3430,5455 3470,5455 3670,5455 3710,5455 3750,5455 4107,5455 4147,5455 4187,5455 4387,5455 4427,5455 4467,5455 7427,5455 7467,5455 7507,5455 7707,5455 7747,5455 7787,5455 70,5495 110,5495 150,5495 350,5495 390,5495 430,5495 3390,5495 3430,5495 3470,5495 3670,5495 3710,5495 3750,5495 4107,5495 4147,5495 4187,5495 4387,5495 4427,5495 4467,5495 7427,5495 7467,5495 7507,5495 7707,5495 7747,5495 7787,5495 70,5835 110,5835 150,5835 350,5835 390,5835 430,5835 3390,5835 3430,5835 3470,5835 3670,5835 3710,5835 3750,5835 4107,5835 4147,5835 4187,5835 4387,5835 4427,5835 4467,5835 7427,5835 7467,5835 7507,5835 7707,5835 7747,5835 7787,5835 70,5875 110,5875 150,5875 350,5875 390,5875 430,5875 3390,5875 3430,5875 3470,5875 3670,5875 3710,5875 3750,5875 4107,5875 4147,5875 4187,5875 4387,5875 4427,5875 4467,5875 7427,5875 7467,5875 7507,5875 7707,5875 7747,5875 7787,5875 190,5955 310,5955 3510,5955 3630,5955 4227,5955 4347,5955 7547,5955 7667,5955 70,5995 110,5995 150,5995 190,5995 230,5995 270,5995 310,5995 350,5995 390,5995 430,5995 3390,5995 3430,5995 3470,5995 3510,5995 3550,5995 3590,5995 3630,5995 3670,5995 3710,5995 3750,5995 4107,5995 4147,5995 4187,5995 4227,5995 4267,5995 4307,5995 4347,5995 4387,5995 4427,5995 4467,5995 7427,5995 7467,5995 7507,5995 7547,5995 7587,5995 7627,5995 7667,5995 7707,5995 7747,5995 7787,5995 70,6035 110,6035 150,6035 190,6035 230,6035 270,6035 310,6035 350,6035 390,6035 430,6035 3390,6035 3430,6035 3470,6035 3510,6035 3550,6035 3590,6035 3630,6035 3670,6035 3710,6035 3750,6035 4107,6035 4147,6035 4187,6035 4227,6035 4267,6035 4307,6035 4347,6035 4387,6035 4427,6035 4467,6035 7427,6035 7467,6035 7507,6035 7547,6035 7587,6035 7627,6035 7667,6035 7707,6035 7747,6035 7787,6035
  other v2: 240,5369 260,5369 3560,5369 3580,5369 4277,5369 4297,5369 7597,5369 7617,5369 225,5381 275,5381 3545,5381 3595,5381 4262,5381 4312,5381 7582,5381 7632,5381 221,5400 279,5400 3541,5400 3599,5400 4258,5400 4316,5400 7578,5400 7636,5400 221,5420 279,5420 3541,5420 3599,5420 4258,5420 4316,5420 7578,5420 7636,5420 181,5425 202,5425 298,5425 319,5425 3501,5425 3522,5425 3618,5425 3639,5425 4218,5425 4239,5425 4335,5425 4356,5425 7538,5425 7559,5425 7655,5425 7676,5425 181,5445 319,5445 3501,5445 3639,5445 4218,5445 4356,5445 7538,5445 7676,5445 181,5465 319,5465 3501,5465 3639,5465 4218,5465 4356,5465 7538,5465 7676,5465 181,5485 319,5485 3501,5485 3639,5485 4218,5485 4356,5485 7538,5485 7676,5485 181,5505 319,5505 3501,5505 3639,5505 4218,5505 4356,5505 7538,5505 7676,5505 181,5825 319,5825 3501,5825 3639,5825 4218,5825 4356,5825 7538,5825 7676,5825 181,5845 319,5845 3501,5845 3639,5845 4218,5845 4356,5845 7538,5845 7676,5845 181,5865 319,5865 3501,5865 3639,5865 4218,5865 4356,5865 7538,5865 7676,5865 181,5885 319,5885 3501,5885 3639,5885 4218,5885 4356,5885 7538,5885 7676,5885 181,5905 202,5905 298,5905 319,5905 3501,5905 3522,5905 3618,5905 3639,5905 4218,5905 4239,5905 4335,5905 4356,5905 7538,5905 7559,5905 7655,5905 7676,5905 221,5910 279,5910 3541,5910 3599,5910 4258,5910 4316,5910 7578,5910 7636,5910 221,5930 279,5930 3541,5930 3599,5930 4258,5930 4316,5930 7578,5930 7636,5930 225,5949 275,5949 3545,5949 3595,5949 4262,5949 4312,5949 7582,5949 7632,5949 240,5961 260,5961 3560,5961 3580,5961 4277,5961 4297,5961 7597,5961 7617,5961
IREF0: C9.2 C17.2 H10.1 R5.1 | length 1908.6
  Top Layer w20: R5.1 5724.53,2971.97 C17.2 5722.56,2940.15 5723.09,2939.62 5723.09,2856.91 v3(5725,2855) ; v3@6985,3095 H10.1
  Bottom Layer w20: v3(5725,2855) 5810,2855 5840,2885 5840,3000 5935,3095 v3@6985,3095
  other v3: 6990,3095
IREF0_M: H9.1 R5.2 | length 830.4
  Top Layer w20: H9.1 4975,3165 5015,3205 5620,3205 5665.47,3159.53 R5.2
IREF1: C10.2 C18.2 H10.2 R6.1 | length 1442.5
  Top Layer w20: v3@6080,2855 v3(6082.86,2857.86) R6.1 ; v3(6990,2995) H10.2
  Bottom Layer w20: v3(6082.86,2857.86) 6084.77,2855.95 6091.85,2855.95 6092.79,2855 6210,2855 6305,2950 6310,2950 6355,2995 v3(6990,2995)
IREF1_M: H9.2 R6.2 | length 1658.7
  Top Layer w20: H9.2 4835,2995 4810,3020 4810,3180 4875,3245 5960,3245 6020,3185 6020,3128.81 R6.2
IREF2: C11.2 C19.2 H10.3 R7.1 | length 1033.6
  Top Layer w20: v3(6440,2865) 6439.23,2865.77 C19.2 6441.19,2971.97 R7.1 ; v3@6985,2895 H10.3
  Bottom Layer w20: v3(6440,2865) 6560,2865 6590,2895 v3@6985,2895 ; v3@6987.5,2895 v3@6992.5,2895
  other v3: 6990,2895
IREF2_M: H9.3 R7.2 | length 2255.8
  Top Layer w20: H9.3 4820,2895 4765,2950 4765,3200 4850,3285 6315,3285 6382.14,3217.86 R7.2
IREF3: C12.2 C20.2 H10.4 R8.1 | length 709.5
  Top Layer w20: R8.1 6799.53,3045 6799.53,2971.97 C20.2 6797.56,2912.44 6915,2795 H10.4 H10.4@7245,2795
IREF3_M: H9.4 R8.2 | length 2826.5
  Top Layer w20: H9.4 4795,2795 4720,2870 4720,3215 4830,3325 6620,3325 6740.47,3204.53 R8.2
IREF4: C13.2 C21.2 H10.7 R9.1 | length 3309
  Top Layer w20: C21.2 5734.53,2466.97 5734.53,2540 R9.1 ; C21.2@5735,2460.06 5735,2295 5790,2240 7520,2240 7720,2440 7720,2920 7545,3095 H10.7
IREF4_M: H9.7 R9.2 | length 985.5
  Top Layer w20: H9.7@5090,3095 5455,3095 5540,3010 5540,2670 5600,2610 R9.2
IREF5: C14.2 C22.2 H10.8 R10.1 | length 2669.6
  Top Layer w20: R10.1 6092.86,2540 6092.86,2466.97 C22.2 6095,2460.89 6095,2340 6140,2295 7480,2295 7660,2475 7660,2865 7530,2995 H10.8
IREF5_M: H9.8 R10.2 | length 1200.5
  Top Layer w20: H9.8@5090,2995 5317.29,2995 5322.29,3000 v3(5325,3000) ; R10.2 6035,2611.19 6033.81,2612.39 6033.81,2779.81 v3(6034,2780)
  Bottom Layer w20: v3(5325,3000) 5330,3005 5450,3005 ; 5460,3000 5685,2775 6025,2775 v3@6030,2780
IREF6: C15.2 C23.2 H10.9 R11.1 | length 2014.7
  Top Layer w20: 6450,2390 6450,2464.23 C23.2 6451.19,2466.97 6451.19,2540 R11.1 ; 6453.19,2391.81 6500,2345 7425,2345 7590,2510 7590,2825 7520,2895 H10.9
IREF6_M: H9.9 R11.2 | length 1500.4
  Top Layer w20: H9.9@5090,2895 H9.9 v3(5325,2895) ; v3(6390,2735) 6391.91,2733.09 6391.91,2660.38 6392.14,2660.16 R11.2
  Bottom Layer w20: v3(5325,2895) 5326.91,2893.09 5456.91,2893.09 5625,2725 6363.28,2725 6367.54,2729.26 6384.26,2729.26 v3(6390,2735)
IREF7: C16.2 C24.2 H10.10 R12.1 | length 1331.2
  Top Layer w20: C24.2@6805.06,2462.5 6872.56,2395 ; C24.2 6809.53,2466.97 6809.53,2540 R12.1 ; 6875,2395 7370,2395 7525,2550 7525,2745 7475,2795 H10.10
IREF7_M: H9.10 R12.2 | length 1777.3
  Top Layer w20: H9.10@5090,2795 v3(5325,2795) ; v3(6749.17,2680) 6750.47,2678.7 R12.2
  Bottom Layer w20: v3(5325,2795) 5440,2795 5555,2680 v3(6749.17,2680)
IREF8: C29.2 C37.2 H17.1 R13.1 | length 441.9
  Top Layer w20: v3(5170,1665) 5171.91,1666.91 5171.91,1739.35 C37.2 C29.2 5174.53,1821.97 R13.1 ; v3@6995,1925 H17.1@7205,1925
  other v3: 7000,1925
IREF8_M: R13.2 VR5.2 | length 186.4
  Top Layer w20: VR5.2 5112.19,1898.28 R13.2
IREF9: C30.2 C38.2 H17.2 R14.1 | length 436.9
  Top Layer w20: v3(5715,1665) 5716.91,1666.91 5716.91,1739.35 C38.2 C30.2 5719.53,1821.97 R14.1 ; v3(7000,1825) H17.2@7205,1825
IREF9_M: R14.2 VR6.2 | length 186.4
  Top Layer w20: VR6.2 5657.19,1898.28 R14.2
IREF10: C31.2 C39.2 H17.3 R15.1 | length 446.9
  Top Layer w20: v3(6260,1665) 6261.91,1666.91 6261.91,1739.35 C39.2 C31.2 6264.53,1821.97 R15.1 ; v3@6995,1725 H17.3@7205,1725
  Bottom Layer w20: v3@6997.5,1725 v3@7002.5,1725
  other v3: 7000,1725
IREF10_M: R15.2 VR7.2 | length 186.4
  Top Layer w20: VR7.2 6202.19,1898.28 R15.2
IREF11: C32.2 C40.2 H17.4 R16.1 | length 435.8
  Top Layer w20: C40.2 C32.2 6809.53,1821.97 R16.1 ; 6925,1625 H17.4@7205,1625
IREF11_M: R16.2 VR8.2 | length 186.4
  Top Layer w20: VR8.2 6747.19,1898.28 R16.2
IREF12: C33.2 C41.2 H17.7 R17.1 | length 3987.2
  Top Layer w20: R17.1 5174.53,1231.97 C33.2 C41.2 5172.56,1007.44 5230,950 7560,950 7705.51,1095.51 7705.51,1774.49 7555,1925 H17.7@7375,1925
IREF12_M: R17.2 VR9.2 | length 191.4
  Top Layer w20: VR9.2 5112.19,1308.28 R17.2
IREF13: C34.2 C42.2 H17.8 R18.1 | length 3163.2
  Top Layer w20: R18.1 5719.53,1231.97 C34.2 C42.2 5717.56,1047.44 5765,1000 7515,1000 7645.51,1130.51 7645.51,1719.49 7540,1825 H17.8@7375,1825
IREF13_M: R18.2 VR10.2 | length 191.4
  Top Layer w20: VR10.2 5657.19,1308.28 R18.2
IREF14: C35.2 C43.2 H17.9 R19.1 | length 2338
  Top Layer w20: R19.1 6264.53,1231.97 C35.2 C43.2 6262.56,1077.44 6295,1045 7455,1045 7575.51,1165.51 7575.51,1679.49 7530,1725 H17.9@7375,1725
IREF14_M: R19.2 VR11.2 | length 186.4
  Top Layer w20: VR11.2 6202.19,1308.28 R19.2
IREF15: C36.2 C44.2 H17.10 R20.1 | length 1476.8
  Top Layer w20: R20.1 6809.53,1231.97 C36.2 C44.2 6807.56,1148.03 6813.31,1142.28 6815.28,1142.28 6872.56,1085 7390,1085 7510.51,1205.51 7510.51,1599.49 7485,1625 H17.10@7375,1625
IREF15_M: R20.2 VR12.2 | length 186.4
  Top Layer w20: VR12.2 6747.19,1308.28 R20.2
NC0: VR1.3 VR5.3 VR6.3 VR7.3 VR8.3 VR9.3 VR10.3 VR11.3 VR12.3
NC1: VR2.3
NC2: VR3.3
NC3: VR4.3
NetC5_1: C5.1 R1.1 U1.5 VR1.1 | length 709.9
  Top Layer w40: U1.5 3343.86,4923.86 3400,4980 VR1.1 3480,4975 3545,4975 3580,4940 3580,4860 3525,4805 3525,4654.94 C5.1
NetC6_1: C6.1 R2.1 U2.5 VR2.1 | length 709.9
  Top Layer w40: U2.5 3343.86,4093.86 3400,4150 VR2.1 3480,4145 3545,4145 3580,4110 3580,4030 3525,3975 3525,3824.94 C6.1
NetC7_1: C7.1 R3.1 U3.5 VR3.1 | length 709.9
  Top Layer w40: U3.5 3343.83,3207.78 3399.97,3263.92 3474.97,3263.92 3479.97,3258.92 3544.97,3258.92 3579.97,3223.92 3579.97,3143.92 3524.97,3088.92 3524.97,2938.86 C7.1
NetC8_1: C8.1 R4.1 U4.5 VR4.1 | length 709.9
  Top Layer w40: U4.5 3343.83,2377.78 3399.97,2433.92 VR4.1 3479.97,2428.92 3544.97,2428.92 3579.97,2393.92 3579.97,2313.92 3524.97,2258.92 3524.97,2108.86 C8.1
VDD0: C5.2 H5.2 H5.4 H5.6 H5.8 R1.2 U1.4
VDD1: C6.2 H6.2 H6.4 H6.6 H6.8 R2.2 U2.4
VDD2: C7.2 H7.2 H7.4 H7.6 H7.8 R3.2 U3.4
VDD3: C8.2 H8.2 H8.4 H8.6 H8.8 R4.2 U4.4 VR5.1 VR6.1 VR7.1 VR8.1 VR9.1 VR10.1 VR11.1 VR12.1
VDD12_0: C26.2 H13.1 H15.4 H15.5 H15.6 U5.4 | length 1963.3
  Top Layer w14: U5.4 7027.2,4777.2 H15.4@7080,4830 ; H15.4@7074.53,4830 H15.4@7080,4830 ; H15.4@7084.88,4834.88 H15.4@7080,4830 ; H15.4@7105,4830 H15.4@7080,4830
  Top Layer w40: H13.1 6560,5070 6655,5165 7085,5165 7120,5130 H15.6 ; H15.4 H15.5 H15.6 ; 7270,5030 H15.6
VDD12_1: C28.2 H14.1 H16.4 H16.5 H16.6 U6.4 | length 1962.5
  Top Layer w14: U6.4 7042.2,3767.2 H16.4@7095,3820 ; H16.4@7089.53,3820 H16.4@7095,3820 ; H16.4@7099.88,3824.88 H16.4@7095,3820 ; H16.4@7120,3820 H16.4@7095,3820
  Top Layer w40: H14.1 6570,4060 6665,4155 7090,4155 7135,4110 H16.6 ; H16.4 H16.5 H16.6 ; 7285,4020 H16.6
VDD33: C1.2 C2.2 C3.2 C4.2 H1.3 H2.3 H3.3 H4.3 P1.1 U1.2 U2.2 U3.2 U4.2 | length 4896.1
  Top Layer w40: H4.3 2471.92,2176.97 2471.92,2076.5 2587.39,1961.03 2587.39,1941.5 v4(2595.05,1933.85) ; H3.3@2469.97,3008.92 2471.92,3006.97 2471.92,2906.5 2587.39,2791.03 2587.39,2771.5 v4(2595.05,2763.85) ; H2.3 2471.95,3893.05 2471.95,3792.57 2587.42,3677.1 2587.42,3657.58 v4(2595.08,3649.92) ; H1.3 2471.95,4723.05 2471.95,4622.57 2587.42,4507.1 2587.42,4487.58 v4(2595.08,4479.92) ; C4.2 2590.12,1928.92 v4(2595.05,1933.85) ; C3.2 2590.12,2758.92 v4(2595.05,2763.85) ; C2.2 2590.15,3645 v4(2595.08,3649.92) ; C1.2 2590.15,4475 v4(2595.08,4479.92) ; U4.2 3113.4,2176.99 3089.97,2153.56 3089.97,2008.92 3019.97,1938.92 v4(2834.97,1938.92) 2833.08,1937.03 2713.15,1937.03 2708.76,1932.63 2596.26,1932.63 v4(2595.05,1933.85) ; U3.2 3113.4,3006.99 3089.97,2983.56 3089.97,2838.92 3019.97,2768.92 v4(2834.97,2768.92) 2833.08,2767.03 2713.15,2767.03 2708.76,2762.63 2596.26,2762.63 v4(2595.05,2763.85) ; U2.2 3113.43,3893.07 3090,3869.64 3090,3725 3020,3655 v4(2835,3655) 2833.11,3653.11 2713.18,3653.11 2708.79,3648.71 2596.29,3648.71 v4(2595.08,3649.92) ; U1.2 3113.43,4723.07 3090,4699.64 3090,4555 3020,4485 v4(2835,4485) 2833.11,4483.11 2713.18,4483.11 2708.79,4478.71 2596.29,4478.71 v4(2595.08,4479.92)
  other v4: 2708.76,1935.13 2708.76,2765.13 2708.79,3651.21 2708.79,4481.21
VDD33_FPGA_0: C25.2 H11.6 H11.12 U5.13 | length 1040.7
  Top Layer w14: 5860,4820 5902.8,4777.2 U5.13
  Top Layer w20: 5860,4820 5860,4965
  Top Layer w30: 5775,5050 5860,4965
  Top Layer w40: C25.2@5297.44,5050 H11.12 H11.6 5775,5050
VDD33_FPGA_1: C27.2 H12.6 H12.12 U6.13 | length 1040.7
  Top Layer w14: 5875,3810 5917.8,3767.2 U6.13
  Top Layer w20: 5875,3810 5875,3955
  Top Layer w30: 5790,4040 5875,3955
  Top Layer w40: C27.2@5312.44,4040 H12.12 H12.6 5790,4040
pads on no net: H9.6 H9.12 H10.6 H10.12 H11.9 H11.10 H12.9 H12.10 H17.6 H17.12

## Polygon pours and split planes (outlines as drawn)
VDD3 on Top Layer (solid, pour order 7): 3810,1355 7055,1355 7055,1695 4450,1695 4450,1860 3810.05,1860 3810,1495
VDD3 on Top Layer "VDD3_L01_P004" (solid, pour order 4): 3810,2000 3810,1860 7055,1860 7055,2200 4450,2200 4450,2000
VDD3 on Top Layer "VDD3_L01_P003" (solid, pour order 3): 3119.97,2278.92 3329.97,2278.92 3329.97,1998.92 4144.97,1998.92 4144.97,2488.92 3119.97,2488.92
no net on Top Layer "NONET_L01_P002" (solid, pour order 2): 3119.97,3108.92 3329.97,3108.92 3329.97,2828.92 4144.97,2828.92 4144.97,3318.92 3119.97,3318.92
no net on Top Layer "NONET_L01_P001" (solid, pour order 1): 3120,3995 3330,3995 3330,3715 4145,3715 4145,4205 3120,4205
VDD0 on Top Layer "VDD0_L01_P000" (solid, pour order 0): 3120,4825 3330,4825 3330,4545 4145,4545 4145,5035 3120,5035
no net on GND Layer (split plane): 7884.9,825.1 1925.1,825.1 1925.1,4784.9 7884.9,4784.9
no net on Power Layer (split plane): 7884.9,825.1 1925.1,825.1 1925.1,4784.9 7884.9,4784.9